# Altium PCB Dev_v2.PcbDoc
Units mm, origin at the board's own origin, x right, y up, seen from the top; angles counter-clockwise.
Board outline 55 x 35 mm, 2 copper layers (Top Layer, Bottom Layer); 51 components, 67 nets, 249 pads, 33 vias.
Unrouted connection lines stored in the file: 41.
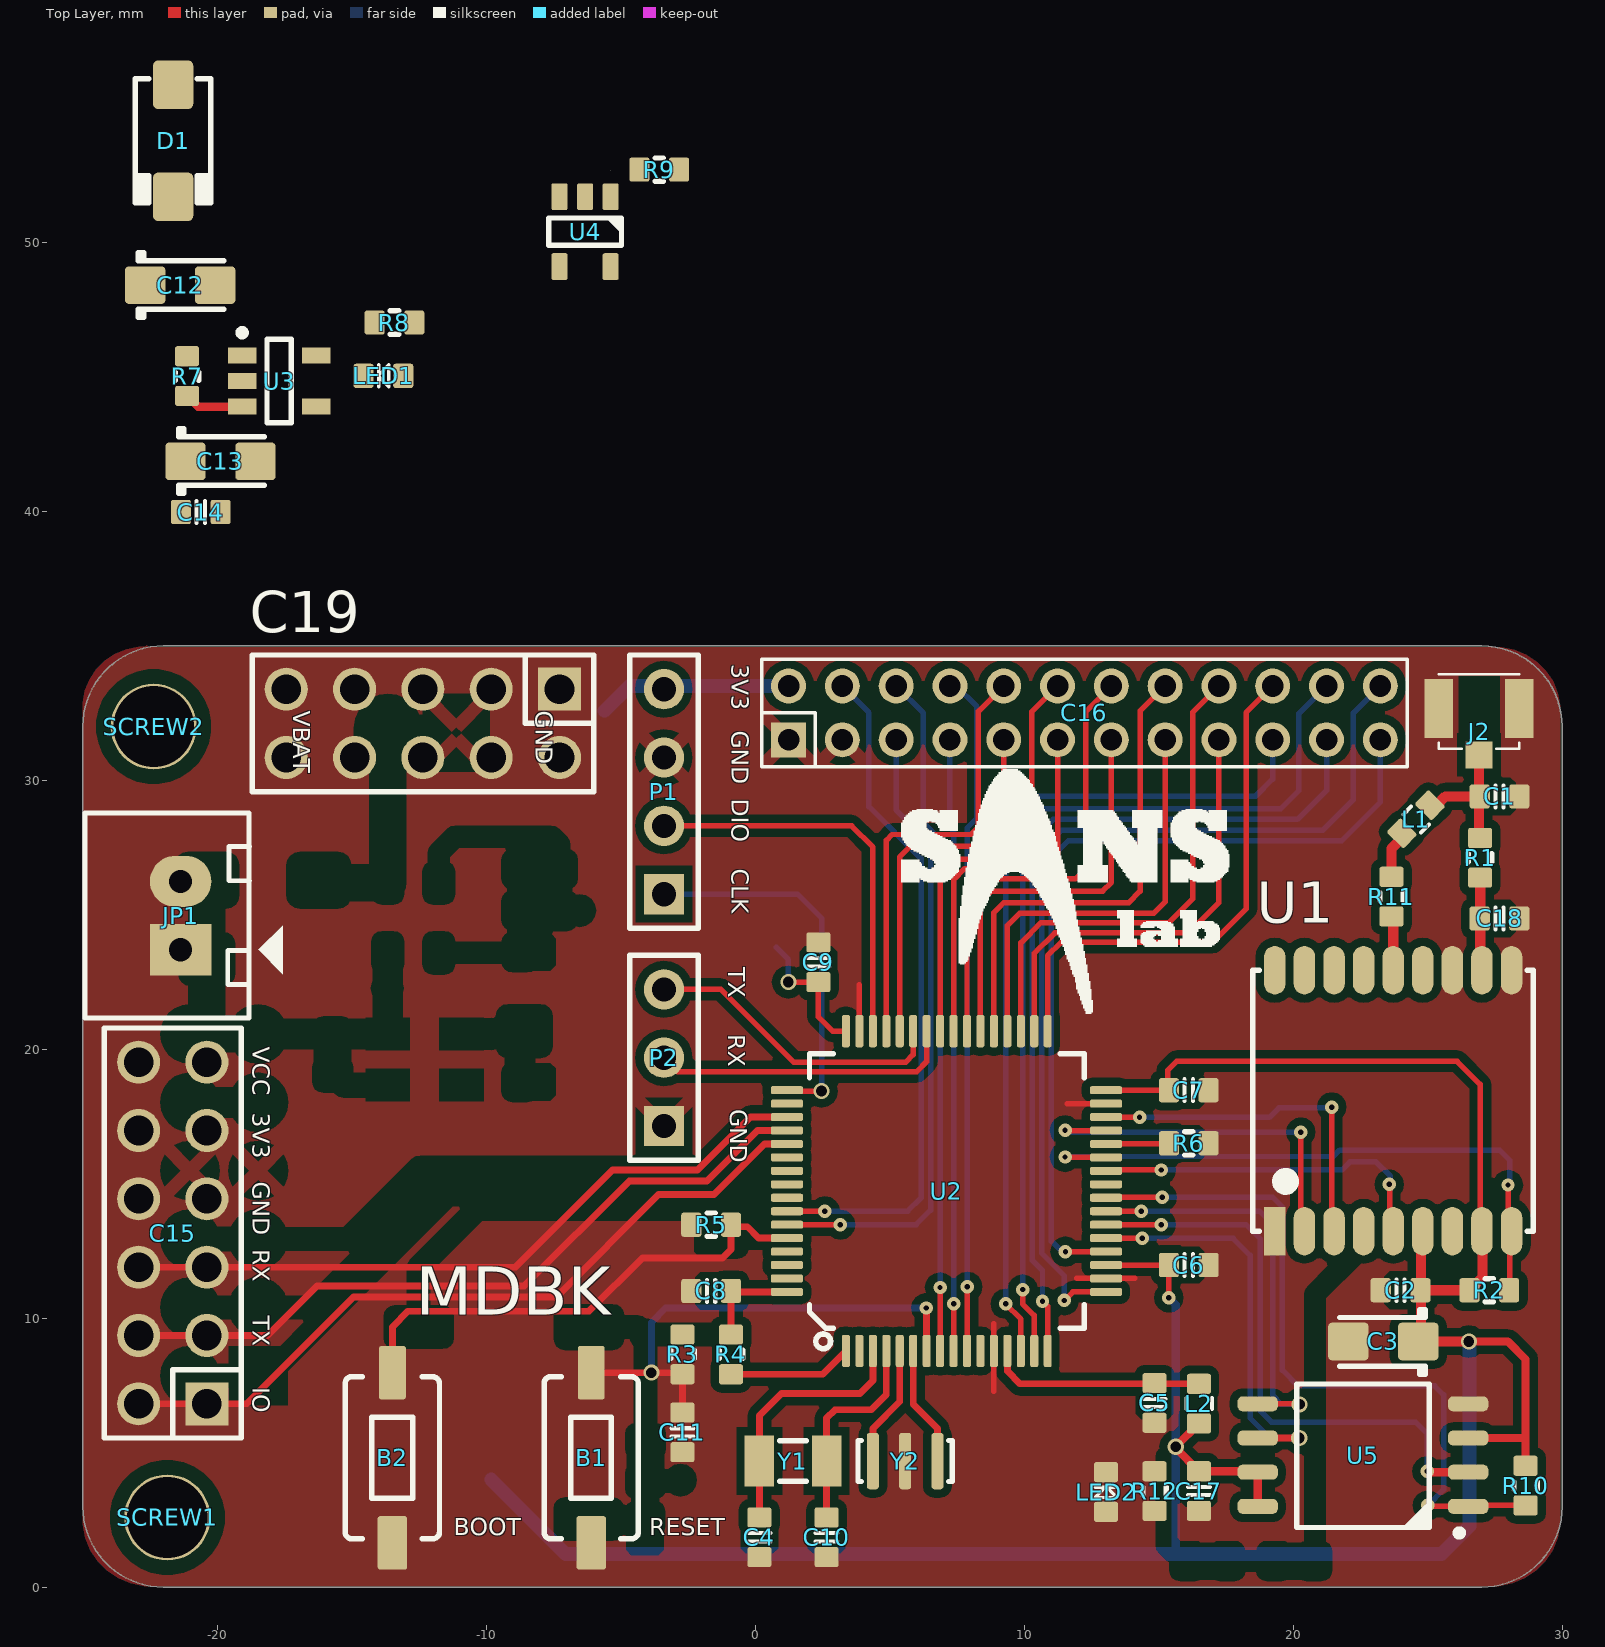
[diagram p0: Top Layer view]
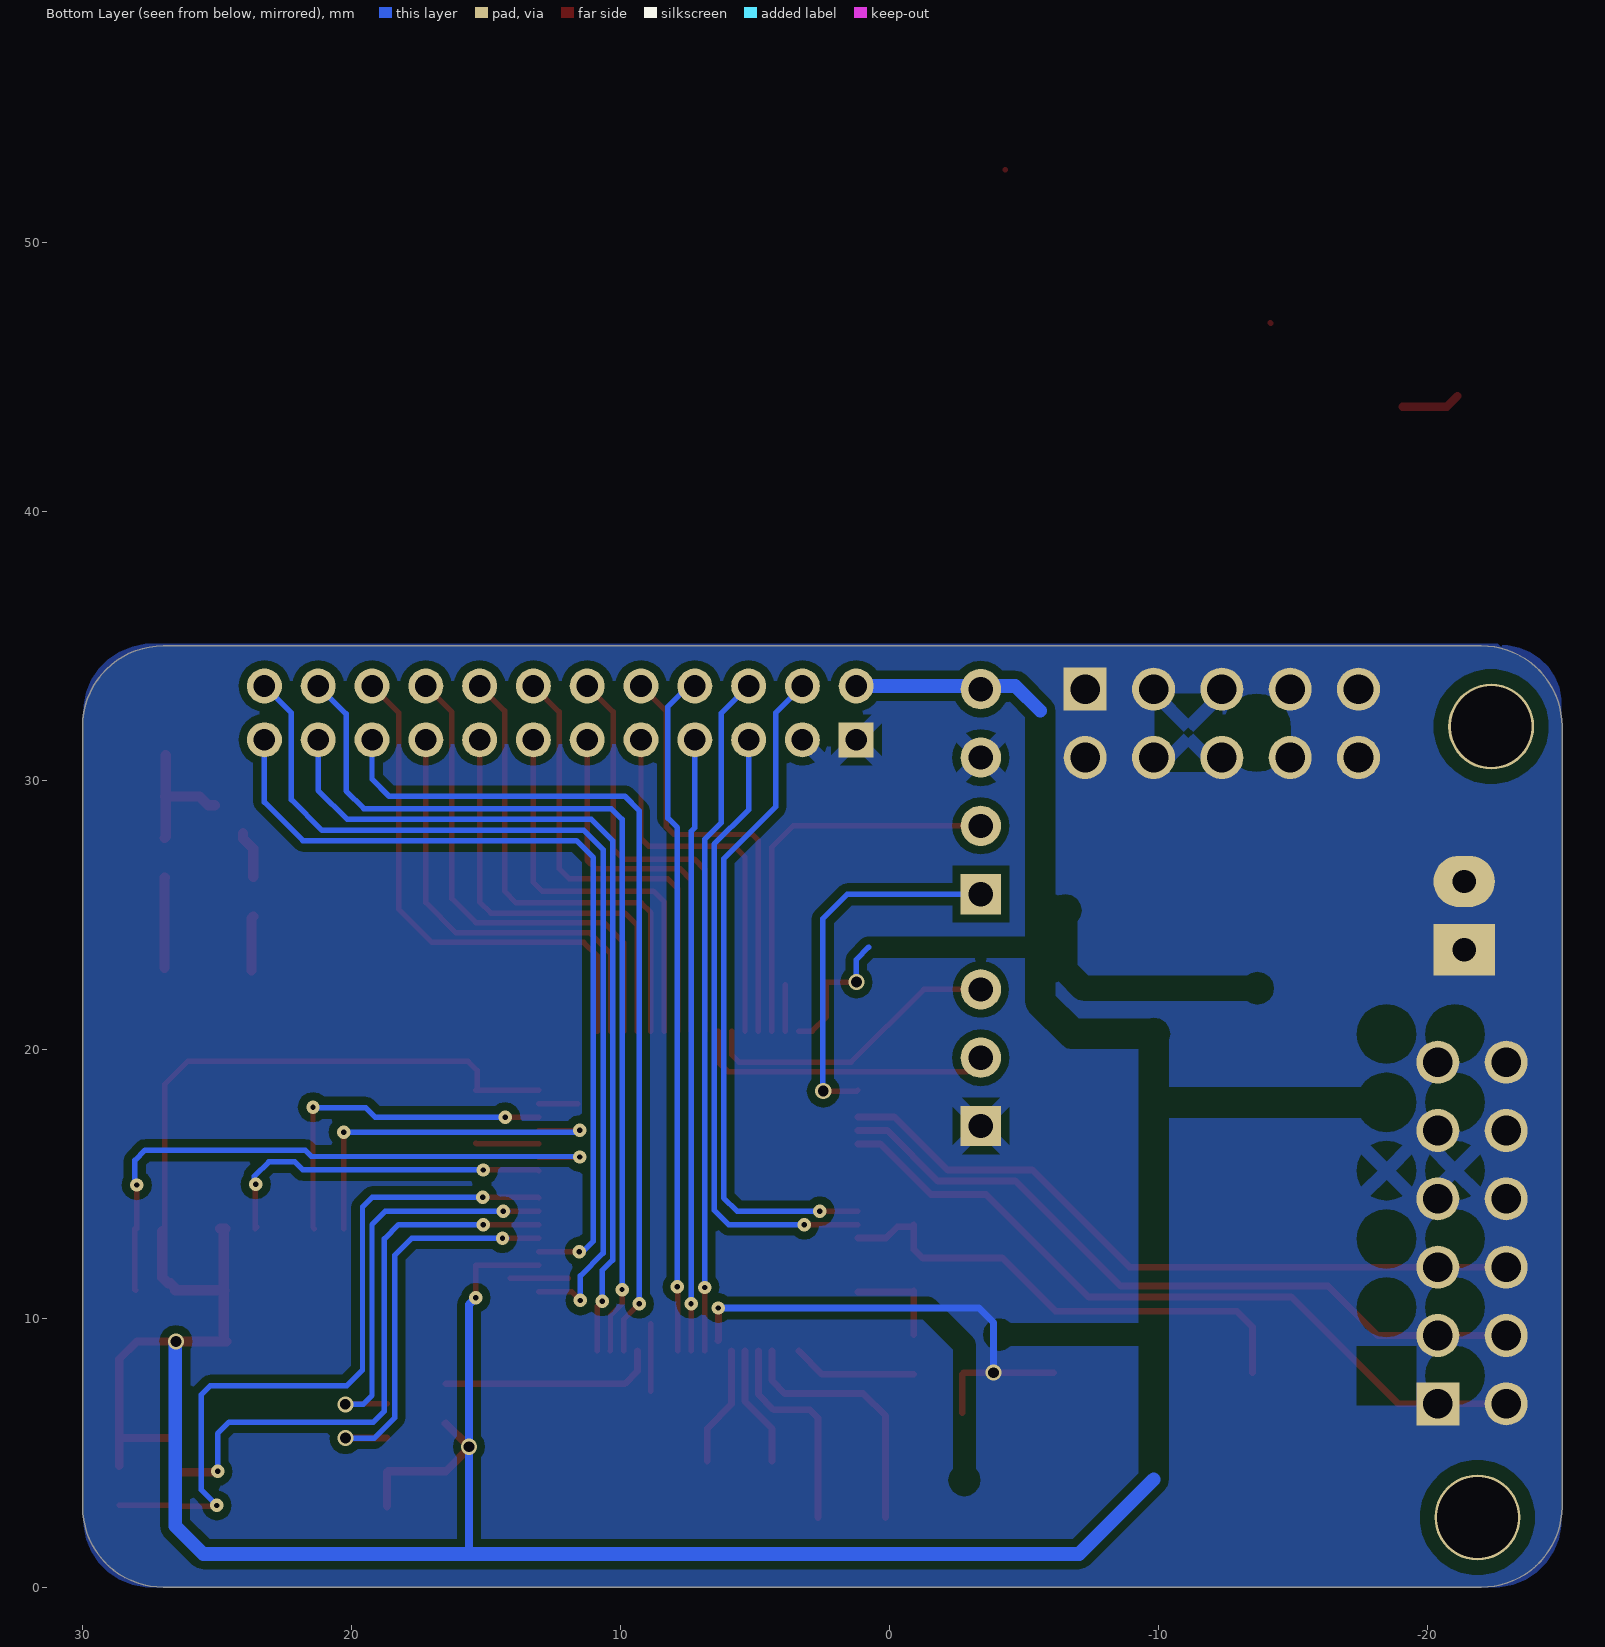
[diagram p1: Bottom Layer view, seen from below]

## Layer stack, top to bottom
Top Solder: solder mask 0.0102, Solder Resist, Dk 3.5
Top Layer: signal copper 0.0356
Dielectric 1: dielectric 0.32, FR-4, Dk 4.8
Bottom Layer: signal copper 0.0356
Bottom Solder: solder mask 0.0102, Solder Resist, Dk 3.5

## Board outline
-25,2.999 -25,31.998 cw(c-22,31.998) -22,34.998 27,34.998 cw(c27,31.998) 30,31.998 30,2.998 cw(c27,2.998) 27,-0.002 -21.999,-0.002 cw(c-21.999,2.999)

## Design rules (kind name [scope] priority, off if disabled: settings)
Clearance [All] p1: gap=0.15 ignorepadtopadclearanceinfootprint=FALSE except(0: Arc-Hole Track-Hole SMDPad-Hole THPad-Hole Via-Hole Fill-Hole Poly-Hole Region-Hole Text-Hole; 0.076: Track-Via; 0.3: Arc-Poly Track-Poly SMDPad-Poly THPad-Poly Via-Poly Fill-Poly Poly-Poly Poly-Region)
ComponentClearance [All] p1: gap=0.1 collisioncheckmode=3 verticalgap=0.1 showdistances=FALSE
HoleSize [All] p1: absolutevalues=TRUE maxlimit=5.08 minlimit=0.025 maxpercent=80.000 minpercent=20.000
MinimumSolderMaskSliver [All] p1: minsoldermaskwidth=0.127
PlaneClearance [All] p1: clearance=0.3
PlaneConnect [All] p1: pad.planeconnectstyle=Direct pad.reliefexpansion=0.2 pad.reliefentries=4 pad.reliefconductorwidth=0.3 pad.reliefairgap=0.2 via.planeconnectstyle=Relief via.reliefexpansion=0.2 via.reliefentries=4 via.reliefconductorwidth=0.3 via.reliefairgap=0.2
PolygonConnect [All] p1: thpad.connectstyle=Relief thpad.reliefconductorwidth=0.5 thpad.reliefentries=4 thpad.polygonreliefangle="45 Angle" thpad.airgapwidth=0.3 smdpad.connectstyle=Direct smdpad.reliefconductorwidth=0.3 smdpad.reliefentries=4 smdpad.polygonreliefangle="90 Angle" smdpad.airgapwidth=0.3 via.connectstyle=Direct via.reliefconductorwidth=0.3 via.reliefentries=4 via.polygonreliefangle="90 Angle" via.airgapwidth=0.3
RoutingVias [All] p1: holewidth=0.45 width=0.254 viastyle="Through Hole" minholewidth=0.152 minwidth=0.254 maxholewidth=0.6 maxwidth=1.1
SilkToSolderMaskClearance [IsPad] p1: minsilkscreentomaskgap=0.025 clearancetoexposedcopper=TRUE
SolderMaskExpansion [All] p1: expansion=0.102
Width [All] p1: maxlimit=1.5 minlimit=0.15 preferedwidth=0.2
24 further rules are at their usual default settings.

## Classes and differential pairs
component class PWR: C12 C13 C14 D1 JP1 LED1 R7 R8 R9 U3 U4
component class MCU: B1 B2 C4 C5 C6 C7 C8 C9 C10 C11 L2 P1 P2 R3 R4 R5 R6 U2 Y1 Y2
component class GPS: C1 C2 C3 C18 J2 L1 LED2 R1 R2 R11 U1
component class FLASH: C17 R10 U5
component class ACCESSORY: C15 C16 C19 SCREW1 SCREW2

## Components (designator, comment, footprint, x,y, rotation, side; value= is the part's Value field where it differs from the comment)
B1 "Reset" TACTILE-SWITCH-1101NE -6.096,4.801 r90 top
B2 "BootLoader" TACTILE-SWITCH-1101NE -13.487,4.801 r90 top
C1 "DNP" C_0603 27.67,29.399 r0 top
C2 "0.01uF" C_0603 23.991,11.041 r0 top
C3 "10uF" "CASE A" 24.651,9.136 r180 top
C4 "10p" C_0603 0.155,1.855 r90 top
C5 "104" C_0603 14.846,6.85 r90 top
C6 "104" C_0603 16.116,11.978 r180 top
C7 "104" C_0603 16.116,18.478 r180 top
C8 "104" C_0603 -1.638,11.015 r0 top
C9 "104" C_0603 2.35,23.233 r270 top
C10 "10p" C_0603 2.654,1.855 r90 top
C11 "104" C_0603 -2.705,5.757 r270 top
C12 "10uF" "CASE A" -22.679,48.404 r0 top
C13 "10uF" "CASE A" -21.18,41.856 r0 top
C14 "0.01uF" C_0603 -20.612,39.971 r180 top
C15 "JP6x2" JP6-D2T -21.653,13.168 r90 top
C16 "JP12x2-2.0" J12-D2T 12.24,32.504 r0 top
C17 "0.01uF" C_0603 16.497,3.573 r90 top
C18 "DNP" C_0603 27.67,24.861 r0 top
C19 "JP5x2" JP5-D2T -12.355,32.114 r180 top
D1 "1N5822" DO-214AC -21.641,53.772 r270 top
J2 "Anten" ANTEN_IPEX 26.908,30.943 r90 top
JP1 "JP2" CON2 -21.361,23.698 r90 top value="Connector 2"
L1 "27nH" INDUCTOR_0603 24.561,28.551 r45 top
L2 "100uH" INDUCTOR_0603 16.497,6.825 r90 top
LED1 "LED" LED_0603 -13.824,45.034 r180 top
LED2 "LED" LED_0603 13.041,3.54 r90 top
P1 "SWD" HDR1X4 -3.392,25.764 r90 top
P2 "Header 3" HDR1X3 -3.392,17.144 r90 top
R1 "0R" R_0603 26.947,27.116 r90 top
R2 "4.7k" R_0603 27.292,11.041 r0 top
R3 "10k" R_0603 -2.705,8.653 r270 top
R4 "22R" R_0603 -0.902,8.653 r270 top
R5 "10k" R_0603 -1.638,13.478 r0 top
R6 "10k" R_0603 16.116,16.502 r180 top
R7 "100k" R_0603 -21.12,45.026 r90 top
R8 "5k" R_0603 -13.411,47.015 r0 top
R9 "1k" R_0603 -3.569,52.701 r0 top
R10 "10k" R_0603 28.639,3.777 r90 top
R11 "10R" R_0603 23.652,25.675 r90 top
R12 "4.7k" R_0603 14.846,3.573 r90 top
SCREW1 "Screw Non-Plated" SCREW_NON-PLATED_2MM -21.857,2.592 r90 top
SCREW2 "Screw Non-Plated" SCREW_NON-PLATED_2MM -22.365,31.996 r90 top
U1 "L70-R" MODULE_MAX-7Q 19.318,13.186 r0 top
U2 "STM32F072RBT6TR" STM32L072RBT 7.123,14.728 r90 top
U3 "AP2112K" SOT25 -17.698,44.838 r0 top
U4 "MCP73831T" SOT23-5 -6.325,50.394 r270 top
U5 "16 Mbit SPI Serial Flash" SOIC127P790X216-8N 22.593,4.911 r180 top
Y1 "Crystal_2P" Crystal_2P 1.404,4.691 r180 top value=32K
Y2 "CSTCE 8MHz" Crystal_4P 5.575,4.691 r0 top

## Footprints (in the part's own frame and the unit in brackets; to place one, negate y for a bottom-side part, rotate by r counter-clockwise, add the part's x,y. Pads: shape width x height; smd on the part's side, far side on the other; paste and mask are expansions set on the pad)
ANTEN_IPEX [mm]
  rect 1x1 smd: 1(0,0)
  rect 2.2x1.05 smd: 2(1.727,-1.5) 2(1.727,1.5)
  Top Layer pour cut-out: 0.635,0.762 0.635,-0.762 2.921,-0.762 2.921,0.762
  silkscreen extent 0.23,-1.5 3,1.5, body extent 0.15,-1.5 3.25,1.5, height 1.25
C_0603 [mm]
  rrect25% 0.75x0.9 smd: 1(-0.737,0) 2(0.737,0)
  Top Layer pour cut-out: -0.6,0.5 -0.4,0.7 0.4,0.7 0.6,0.5 0.6,-0.5 0.4,-0.7 -0.4,-0.7 -0.6,-0.5
  silkscreen extent -0.15,-0.41 0.15,0.41, body extent -0.8,-0.41 0.8,0.41, height 0.81
"CASE A" [mm]
  rrect20% 1.5x1.4 smd: A(0,0) K(2.6,0)
  silkscreen extent -0.26,-1.19 2.92,1.21, body extent -0.3,-0.8 2.9,0.8, height 1.6
CON2 [mil] "CON2"
  rect 75x90 hole 34: 1(0,0)
  oval 75x90 hole 34: 2(100,0)
  silkscreen extent -100,-150 200,140, body extent -68,-70 168,107, height 236
Crystal_2P [mm]
  rect 1.1x1.9 smd: 1(-1.25,0) 2(1.25,0)
  silkscreen extent -0.5,-0.75 0.5,0.75, body extent -1.61,-0.76 1.61,0.76, height 0.92
Crystal_4P [mm]
  rrect50% 0.45x2.1 smd: 1(-1.2,0) 2(0,0) 3(1.2,0)
  silkscreen extent -1.75,-0.76 1.75,0.76, body extent -1.6,-0.65 1.6,0.65, height 0.7
DO-214AC [mm] "JEDEC DO214 variation AC. SMA"
  round 0.508 on Mech15: 0(0,0)
  rrect25% 1.8x1.5 smd: A(-2.083,0) K(2.083,0)
  silkscreen extent -2.3,-1.4 2.3,1.4, body extent -2.75,-1.37 2.75,1.43, height 2.6
HDR1X3 [mm] "Connector; Header; 3 Position"
  rect 1.5x1.5 hole 0.9: 1(0,0)
  round 1.5 hole 0.9: 2(2.54,0) 3(5.08,0)
  silkscreen extent -1.27,-1.27 6.35,1.27, body extent -1.27,-1.27 6.35,1.27, height 7
HDR1X4 [mm] "Connector; Header; 4 Position"
  rect 1.5x1.5 hole 0.9: 1(0,0)
  round 1.5 hole 0.9: 2(2.54,0) 3(5.08,0) 4(7.62,0)
  silkscreen extent -1.27,-1.27 8.89,1.27, body extent -1.27,-1.27 8.89,1.27, height 7
INDUCTOR_0603 [mm]
  rrect25% 0.75x0.9 smd: 1(-0.737,0) 2(0.737,0)
  Top Layer pour cut-out: -0.6,0.5 -0.4,0.7 0.4,0.7 0.6,0.5 0.6,-0.5 0.4,-0.7 -0.4,-0.7 -0.6,-0.5
  silkscreen extent -0.2,-0.48 0.2,0.46, body extent -0.8,-0.4 0.8,0.4, height 0.96
J12-D2T [mm] "24 pins, dual row, straight, gold plating"
  rect 1.3x1.3 hole 0.8: 1(-11,-1)
  round 1.3 hole 0.8: 2(-9,-1) 3(-7,-1) 4(-5,-1) 5(-3,-1) 6(-1,-1) 7(1,-1) 8(3,-1) 9(5,-1) 10(7,-1) 11(9,-1) 12(11,-1) 13(11,1) 14(9,1) 15(7,1) 16(5,1) 17(3,1) 18(1,1) 19(-1,1) 20(-3,1) 21(-5,1) 22(-7,1) 23(-9,1) 24(-11,1)
  silkscreen extent -12,-2 12,2, body extent -12,-2 12,2, height 6.01
JP5-D2T [mm] "10 pins, dual pin, straight, gold plating"
  rect 1.6x1.6 hole 1.1: 1(-5.08,-1.27)
  round 1.6 hole 1.1: 2(-2.54,-1.27) 3(0,-1.27) 4(2.54,-1.27) 5(5.08,-1.27) 6(5.08,1.27) 7(2.54,1.27) 8(0,1.27) 9(-2.54,1.27) 10(-5.08,1.27)
  silkscreen extent -6.35,-2.54 6.35,2.54, body extent -6.35,-2.54 6.35,2.54, height 8.55
JP6-D2T [mm] "12 pins, dual pin, straight, gold plating"
  rect 1.6x1.6 hole 1.1: 1(-6.35,-1.27)
  round 1.6 hole 1.1: 2(-3.81,-1.27) 3(-1.27,-1.27) 4(1.27,-1.27) 5(3.81,-1.27) 6(6.35,-1.27) 7(6.35,1.27) 8(3.81,1.27) 9(1.27,1.27) 10(-1.27,1.27) 11(-3.81,1.27) 12(-6.35,1.27)
  silkscreen extent -7.62,-2.54 7.62,2.54, body extent -7.62,-2.54 7.62,2.54, height 8.55
LED_0603 [mm]
  rrect25% 0.75x0.9 smd: A(-0.737,0) K(0.737,0)
  Top Layer pour cut-out: -0.6,0.5 -0.4,0.7 0.4,0.7 0.6,0.5 0.6,-0.5 0.4,-0.7 -0.4,-0.7 -0.6,-0.5
  silkscreen extent -0.2,-0.41 0.18,0.41, body extent -0.8,-0.4 0.8,0.4, height 0.75
MODULE_MAX-7Q [mm]
  rect 0.8x1.8 smd: 1(0,0.05)
  oval 0.8x1.8 smd: 2(1.1,0.05) 3(2.2,0.05) 4(3.3,0.05) 5(4.4,0.05) 6(5.5,0.05) 7(6.6,0.05) 8(7.7,0.05) 9(8.8,0.05) 10(8.8,9.75) 11(7.7,9.75) 12(6.6,9.75) 13(5.5,9.75) 14(4.4,9.75) 15(3.3,9.75) 16(2.2,9.75) 17(1.1,9.75) 18(0,9.75)
  silkscreen extent -0.82,0.05 9.6,9.75, body extent -0.65,0.03 9.45,9.75, height 2.51
R_0603 [mm]
  round 0.254 on Mech15: 0(0,0)
  rrect25% 0.75x0.9 smd: 1(-0.737,0) 2(0.737,0)
  Top Layer pour cut-out: -0.6,0.5 -0.4,0.7 0.4,0.7 0.6,0.5 0.6,-0.5 0.4,-0.7 -0.4,-0.7 -0.6,-0.5
  silkscreen extent -0.15,-0.43 0.15,0.43, body extent -0.8,-0.4 0.8,0.4, height 0.46
SCREW_NON-PLATED_2MM [mm]
  round 3.2 hole 3 unplated paste+1 mask+1: HOLE(0,0)
  Top Layer pour cut-out: -0.209,-2.127 -0.62,-2.045 -1.007,-1.885 -1.356,-1.652 -1.652,-1.356 -1.885,-1.007 -2.045,-0.62 -2.127,-0.209 -2.127,0.209 -2.045,0.62 -1.885,1.007 -1.652,1.356 -1.356,1.652 -1.007,1.885 -0.62,2.045 -0.209,2.127 0.209,2.127 0.62,2.045 1.007,1.885 1.356,1.652 1.652,1.356 1.885,1.007 2.045,0.62 2.127,0.209 2.127,-0.209 2.045,-0.62 1.885,-1.007 1.652,-1.356 1.356,-1.652 1.007,-1.885 0.62,-2.045 0.209,-2.127
  Bottom Layer pour cut-out: -0.209,-2.127 -0.62,-2.045 -1.007,-1.885 -1.356,-1.652 -1.652,-1.356 -1.885,-1.007 -2.045,-0.62 -2.127,-0.209 -2.127,0.209 -2.045,0.62 -1.885,1.007 -1.652,1.356 -1.356,1.652 -1.007,1.885 -0.62,2.045 -0.209,2.127 0.209,2.127 0.62,2.045 1.007,1.885 1.356,1.652 1.652,1.356 1.885,1.007 2.045,0.62 2.127,0.209 2.127,-0.209 2.045,-0.62 1.885,-1.007 1.652,-1.356 1.356,-1.652 1.007,-1.885 0.62,-2.045 0.209,-2.127
SOIC127P790X216-8N [mil]
  rrect70% 59x22 smd: 1(-154,75) 2(-154,25) 3(-154,-25) 4(-154,-75) 5(154,-75) 6(154,-25) 7(154,25) 8(154,75)
  silkscreen extent -146,-104 97,119, body extent -160,-107 159,107, height 65
SOT23-5 [mm]
  round 0.5 on Mech15: 0(0,0)
  rrect25% 1x0.6 smd: 1(-1.3,0.95) 2(-1.3,0) 3(-1.3,-0.95) 4(1.3,-0.95) 5(1.3,0.95)
  silkscreen extent -0.51,-1.35 0.51,1.35, body extent -1.4,-1.45 1.4,1.45, height 1.44
SOT25 [mm]
  rect 1.05x0.6 smd: 1(-1.375,0.95) 2(-1.375,0) 3(-1.375,-0.95) 4(1.375,-0.95) 5(1.375,0.95)
  silkscreen extent -1.5,-1.55 0.45,1.92, body extent -1.5,-1.55 1.5,1.55, height 1.3
STM32L072RBT [mm]
  rrect50% 1.2x0.3 smd: 1(-5.944,3.75) 2(-5.944,3.25) 3(-5.944,2.75) 4(-5.944,2.25) 5(-5.944,1.75) 6(-5.944,1.25) 7(-5.944,0.75) 8(-5.944,0.25) 9(-5.944,-0.25) 10(-5.944,-0.75) 11(-5.944,-1.25) 12(-5.944,-1.75) 13(-5.944,-2.25) 14(-5.944,-2.75) 15(-5.944,-3.25) 16(-5.944,-3.75) 33(5.944,-3.75) 34(5.944,-3.25) 35(5.944,-2.75) 36(5.944,-2.25) 37(5.944,-1.75) 38(5.944,-1.25) 39(5.944,-0.75) 40(5.944,-0.25) 41(5.944,0.25) 42(5.944,0.75) 43(5.944,1.25) 44(5.944,1.75) 45(5.944,2.25) 46(5.944,2.75) 47(5.944,3.25) 48(5.944,3.75)
  rrect50% 0.3x1.2 smd: 17(-3.75,-5.918) 18(-3.25,-5.918) 19(-2.75,-5.918) 20(-2.25,-5.918) 21(-1.75,-5.918) 22(-1.25,-5.918) 23(-0.75,-5.918) 24(-0.25,-5.918) 25(0.25,-5.918) 26(0.75,-5.918) 27(1.25,-5.918) 28(1.75,-5.918) 29(2.25,-5.918) 30(2.75,-5.918) 31(3.25,-5.918) 32(3.75,-5.918) 49(3.75,5.944) 50(3.25,5.944) 51(2.75,5.944) 52(2.25,5.944) 53(1.75,5.944) 54(1.25,5.944) 55(0.75,5.944) 56(0.25,5.944) 57(-0.25,5.944) 58(-0.75,5.944) 59(-1.25,5.944) 60(-1.75,5.944) 61(-2.25,5.944) 62(-2.75,5.944) 63(-3.25,5.944) 64(-3.75,5.944)
  silkscreen extent -5.86,-5.11 5.11,5.11, body extent -6.03,-6.03 6.03,6.03, height 1.61
TACTILE-SWITCH-1101NE [mm]
  rrect20% 2x1.1 smd: 1(-3.15,0)
  rrect20% 2x1 smd: 2(3.175,0)
  silkscreen extent -3,-1.75 3.02,1.75, body extent -4,-1.82 4,1.88, height 2.5

## Part data
B1 B2: library part Button_2P_SMD
C1 C2 C14 C17 C18: library part CAP_0603
C3: library part Capacitor-Tantalium, "CAP TANT 10UF 16V 10% 2917", Case="A CASE", Manufacturer=KEMET, Manufacturer1 Example=MDBK, Manufacturer Part Number=T491A106K010AT, Tolerance=20%, Voltage=10VDC, ComponentHeigh=https://www.mouser.vn, Component Type=Standard, ID=3, Mounted=Yes, Part Description="CAP TANT 10UF 10V 10% 1206", Part Number=T491A106K010AT, Pin Count=2, SMD=Yes, Socket=No, Status="Not Recommended"
C4 C5 C6 C7 C8 C9 C10 C11: library part "Cap SMD 0805", "Capacitor SMD", LatestRevisionDate=17-Jul-2002, LatestRevisionNote="Re-released for DXP Platform.", PackageReference=RAD-0.3, Published=8-Jun-2000, Publisher="Altium Limited"
C12 C13: "CAP TANT 10UF 16V 10% 2917", Case="A CASE", Manufacturer=KEMET, Manufacturer1 Example=MDBK, Manufacturer Part Number=T491A106K010AT, Tolerance=20%, Voltage=10VDC, ComponentHeigh=https://www.mouser.vn, Component Type=Standard, ID=3, Mounted=Yes, Part Description="CAP TANT 10UF 10V 10% 1206", Part Number=T491A106K010AT, Pin Count=2, SMD=Yes, Socket=No, Status="Not Recommended"
C15: "WR-PHD 2.54 mm Dual Socket Header", Manufacturer="W¨¹rth Elektronik eiSos GmbH", partNo=61301221821, ComponentLink1 Description=Manufacturer, ComponentLink1URL=http://www.we-online.com, ComponentLink2 Description=Datasheet, ComponentLink2URL=http://katalog.we-online.de/em/datasheet/6130xx21821.pdf, Created by="Karrer Zheng", Created Date="29 March 2013", NoPins=12
C16: "WR-PHD 2.00 mm Dual Pin Header", Manufacturer="W¨¹rth Elektronik eiSos GmbH", partNo=62002421121, ComponentLink1 Description=Manufacturer, ComponentLink1URL=http://www.we-online.com, ComponentLink2 Description=Datasheet, ComponentLink2URL=http://katalog.we-online.de/em/datasheet/6200xx21121.pdf, Created by="Karrer Zheng", Created Date="2 April 2013", NoPins=24, System=Connector
C19: "WR-PHD 2.54 mm Dual Socket Header", Manufacturer="W¨¹rth Elektronik eiSos GmbH", partNo=61301021821, ComponentLink1 Description=Manufacturer, ComponentLink1URL=http://www.we-online.com, ComponentLink2 Description=Datasheet, ComponentLink2URL=http://katalog.we-online.de/em/datasheet/6130xx21821.pdf, Created by="Karrer Zheng", Created Date="29 March 2013", NoPins=10
D1: library part DIODE_1N5822, "3A 40V SS34"
J2: library part ANTEN_IPEX, "CONN UMC RCPT STR 50 OHM SMD", Case/Package=SMD/SMT, Housing Color=White, Manufacturer=Taoglas, Manufacturer Part Number=RECE.20279.001E.01, Package Quantity=1, Supplier Part Number 1=931-1107-6-ND, Body Material=Brass, Body Plating=Gold, Connector Type="Coaxial,Male Pin", Contact Material=Brass, Contact Plating=Gold, Fastening Type=Snap, Gender=Male, Mount="Surface Mount", Orientation=Straight, Packaging="Tape and Reel", Pricing 1="1=0.75 (USD)", Stock 1=45630, Supplier 1=Digi-Key, Termination=Solder
JP1: library part Con2, "Connector 2"
L1: library part INDUCTOR_0603
L2: library part INDUCTOR_0805
LED1 LED2: library part LED_0603
P1: library part "Header 4", "Header, 4-Pin", LatestRevisionDate=17-Jul-2002, LatestRevisionNote="Re-released for DXP Platform.", Publisher="Altium Limited"
P2: "Header, 3-Pin", LatestRevisionDate=17-Jul-2002, LatestRevisionNote="Re-released for DXP Platform.", Publisher="Altium Limited"
R1 R2 R7 R8 R9 R10 R11 R12: library part RES_0603
R3 R4 R5 R6: library part RESISTOR_0805
SCREW1 SCREW2: library part SCREW_NON-PLATED
U1: "GPS Receiver 1575.42MHz 2.5V/3.3V 18-Pin", Manufacturer="Quectel Wireless Solutions", Manufacturer Part Number=L70R, Max Frequency=1.57542GHz, Max Operating Temperature=85°C, Min Operating Temperature=-40°C, Supplier Part Number 1=L70R-M37, ComponentLink1Description=https://datasheet.ciiva.com/48437/quectel-l70-r-gps-specification-v1-0-48437770.pdf?src-supplier=Avnet, ComponentLink1URL=https://datasheet.ciiva.com/48437/quectel-l70-r-gps-specification-v1-0-48437770.pdf?src-supplier=Avnet, Packaging="Tape and Reel", Radiation Hardening=No, RoHS=Yes, Stock 1=0, Supplier 1=Avnet
U2: "IC MCU 32BIT 128KB FLASH 64LQFP", Case/Package=LQFP, Frequency=48MHz, Manufacturer=STMicroelectronics, Manufacturer Part Number=STM32F072RBT6, Max Operating Temperature=85°C, Max Power Dissipation=455mW, Max Supply Voltage=3.6V, Min Operating Temperature=-40°C, Min Supply Voltage=2V, Package Quantity=960, Supplier Part Number 1=497-14644-ND, ComponentLink1Description=http://www.st.com/web/en/resource/technical/document/datasheet/DM00090510.pdf?src-supplier=Avnet, ComponentLink1URL=http://www.st.com/web/en/resource/technical/document/datasheet/DM00090510.pdf?src-supplier=Avnet, Core Architecture=ARM, Data Bus Width=32b, Interface=I2C,SPI,USB,CAN,HDMI,IrDA,UART,USART,LIN,I2S, Lead Free="Lead Free", Max Frequency=48MHz, Memory Size=128KB, Memory Type=FLASH, Mount="Surface Mount", Number of ADC Channels=19, Number of I/Os=51, Number of Pins=64, Number of Programmable I/O=51, Number of Timers/Counters=9, Oscillator Type=Internal, Packaging=Tray, Peripherals=POR,PWM,WDT,DMA, Pricing 1="1=3.93, 10=3.532, 160=2.89381, 640=2.46344, 1120=2.0776 (USD)", RAM Size=16KB, REACH SVHC="No SVHC", Stock 1=9149, Supplier 1=Digi-Key, Watchdog Timer=Yes, Weight=0.012088oz
U3: "IC REG LINEAR 3.3V 600MA SOT25", Case/Package=SOT-23-5, Dropout Voltage=250mV, Manufacturer=Diodes, Manufacturer Part Number=AP2112K-3.3TRG1, Max Input Voltage=6V, Max Operating Temperature=85°C, Max Output Current=600mA, Min Input Voltage=2.5V, Min Operating Temperature=-40°C, Output Voltage=3.3V, Package Quantity=1, Quiescent Current=55uA, Supplier Part Number 1=621-AP2112K-3.3TRG1, Accuracy=1.5%, ComponentLink1Description=http://www.diodes.com/datasheets/AP2112.pdf?src-supplier=Avnet, ComponentLink1URL=http://www.diodes.com/datasheets/AP2112.pdf?src-supplier=Avnet, ComponentLink2Description=https://www.diodes.com/assets/Datasheets/AP2112.pdf?src-supplier=Digi-Key, ComponentLink2URL=https://www.diodes.com/assets/Datasheets/AP2112.pdf?src-supplier=Digi-Key, Height=1.3mm, Lead Free="Lead Free", Length=3.1mm, Mount="Surface Mount", Number of Outputs=1, Number of Pins=5, Number of Regulators=1, Output Current=600mA, Output Type=Fixed, Packaging="Tape and Reel", Polarity=Positive, Pricing 1="1=0.47, 10=0.327, 50=0.327, 100=0.15, 1000=0.116, 10000=0.09 (USD)", Stock 1=34833, Supplier 1=Mouser, Width=1.7mm
U4: "IC CONTROLLR LI-ION 4.2V SOT23-5", Case/Package=SOT-23, Drain to Source Resistance=350mR, Manufacturer=Microchip, Manufacturer Part Number=MCP73831T-2ACI/OT, Max Charge Current=500mA, Max Input Voltage=6V, Max Operating Temperature=85°C, Max Output Voltage=4.5V, Max Power Dissipation=1.54W, Min Operating Temperature=-40°C, Min Output Voltage=4.168V, Min Supply Voltage=3.75V, Output Voltage=4.2V, Supplier Part Number 1=MCP73831T-2ACI/OTDKR-ND, Voltage Rating=4.534V, ComponentLink1Description=http://www.microchip.com/mymicrochip/filehandler.aspx?ddocname=en023833&src-supplier=Digi-Key, ComponentLink1URL=http://www.microchip.com/mymicrochip/filehandler.aspx?ddocname=en023833&src-supplier=Digi-Key, ComponentLink2Description=http://www.farnell.com/datasheets/630369.pdf?src-supplier=Element14, ComponentLink2URL=http://www.farnell.com/datasheets/630369.pdf?src-supplier=Element14, ComponentLink3Description=http://www.farnell.com/datasheets/2124927.pdf?src-supplier=Element14, ComponentLink3URL=http://www.farnell.com/datasheets/2124927.pdf?src-supplier=Element14, ComponentLink4Description=http://ww1.microchip.com/downloads/en/DeviceDoc/21984e.pdf?src-supplier=Avnet, ComponentLink4URL=http://ww1.microchip.com/downloads/en/DeviceDoc/21984e.pdf?src-supplier=Avnet, ComponentLink5Description=http://www.farnell.com/datasheets/2124927.pdf?src-supplier=Newark, ComponentLink5URL=http://www.farnell.com/datasheets/2124927.pdf?src-supplier=Newark, ComponentLink6Description=http://www.microchip.com/mymicrochip/filehandler.aspx?ddocname=en025112&src-supplier=Future+Electronics, ComponentLink6URL=http://www.microchip.com/mymicrochip/filehandler.aspx?ddocname=en025112&src-supplier=Future+Electronics, ComponentLink7Description=http://www.produktinfo.conrad.com/datenblaetter/650000-674999/651521-da-01-en-CONTR__MCP73831T_2ACI_OT_SOT_23_5_MCP.pdf?src-supplier=Conrad, ComponentLink7URL=http://www.produktinfo.conrad.com/datenblaetter/650000-674999/651521-da-01-en-CONTR__MCP73831T_2ACI_OT_SOT_23_5_MCP.pdf?src-supplier=Conrad, Contact Plating=Tin,Matte, Height=0.051inch, Lead Free="Lead Free", Length=0.122inch, Max Supply Voltage=6V, Mount="Surface Mount", Number of Cells=1, Number of Channels=1, Number of Outputs=1, Number of Pins=5, Output Current=500mA, Packaging="Tape and Reel", Pricing 1="1=0.58, 25=0.484, 100=0.4326 (USD)", Radiation Hardening=No, REACH SVHC="No SVHC", Stock 1=50323, Supplier 1=Digi-Key, Termination=SMD/SMT, Weight=0.00709oz, Width=0.071inch
U5: library part SST25VF016B, MPN=SST25VF016B-50-4I-S2AF, PACKAGE=SOIC-8, OC_FARNELL=1368695, OC_NEWARK=82R4471, SUPPLIER="SILICON STORAGE TECHNOLOGY"
Y2: library part Crystal_CSTCE, "(T) Crystal MHz with Capacitance Built-in"

## Via types
v1: diameter 0.5, hole 0.2, Top Layer to Bottom Layer, tented both sides, 26 vias
v2: diameter 0.6, hole 0.4, Top Layer to Bottom Layer, tented both sides, 6 vias
v3: diameter 0.6, hole 0.4, Top Layer to Bottom Layer, 1 vias

## Nets (pads, with @x,y where several pads share a name; then routed paths per layer and width w, separated by ;. In a path a pad name is that pad's centre, name@x,y a point inside that pad or via, vN(x,y) a via of type N, cw(c..) or ccw(c..) an arc to the next point about the centre after c; other vN are vias at no path point)
1PPS: LED2.K U1.4
3V3: B2.1 C2.2 C3.A C6.2 C7.2 C8.2 C9.2 C13.A C14.2 C15.5 C15.8 C16.24 C17.2 C19.1 C19.10 L2.1 P1.4 R2.1 R3.1 R4.1 R10.2 R12.2 U1.6 U1.8 U2.19 U2.32 U2.48 U2.64 U3.5 U5.3 U5.7 U5.8 | length 119.8
  Top Layer w0.203: v2@1.13,22.496 v2(1.232,22.496) C9.2 2.35,21.201 2.879,20.672 U2.48 ; U2.19 C6.2 v1(15.38,10.761) ; U2.32 C7.2 15.329,18.529 15.329,19.215 15.664,19.55 26.099,19.55 26.952,18.696 U1.8@26.952,13.327
  Top Layer w0.254: R4.1 C8.2@-0.902,10.978 ; C8.2 C8.2@-0.902,10.978 ; U2.64 C8.2@-0.902,10.978
  Top Layer w0.305: L2.1 v2(15.634,5.224) 15.634,5.173 C17.2 18.648,4.31 U5.7 U5.8 ; U5.3 28.639,5.546 ; v2(26.53,9.136) 27.978,9.136 28.639,8.475 28.639,5.546 ; R10.2 28.639,5.546
  Top Layer w0.381: U1.6@24.685,13.327 U1.6@24.883,13.327 ; C2.2 C2.2@24.752,11.041 ; U1.6@24.752,13.327 C2.2@24.752,11.041 ; v2(26.53,9.136) C3.A 24.752,9.237 C2.2@24.752,11.041 ; U1.8@27.041,13.236 27.041,11.527 26.815,11.3 26.74,11.3 26.555,11.116 R2.1 C2.2@24.752,11.041
  Bottom Layer w0.203: 0.775,23.792 1.232,23.334 v2(1.232,22.496)
  Bottom Layer w0.305: v1(15.38,10.761) 15.634,10.507 v2(15.634,5.224) 15.634,1.236
  Bottom Layer w0.508: -9.817,4.005 -7.048,1.236 15.634,1.236 25.514,1.236 26.556,2.278 v2@26.556,9.136 ; -5.601,32.58 -4.677,33.504 -3.392,33.504 C16.24
BAT_Backup: R4.2 U2.1 | length 4.6
  Top Layer w0.254: R4.2 2.506,7.917 U2.1
GND: B1.1 C1.2 C2.1 C3.K C4.1 C5.1 C6.1 C7.1 C8.1 C9.1 C10.1 C11.2 C12.K C13.K C14.1 C15.4 C15.9 C16.1 C16.2 C17.1 C18.2 C19.2 C19.9 J2.2 JP1.1 P1.3 P2.1 R5.1 R6.1 R8.2 U1.1 U1.10 U1.12 U2.12 U2.18 U2.31 U2.47 U2.63 U3.2 U4.2 U5.4 Y2.2 | length 7.9
  Top Layer w0.203: U2.47 3.873,22.395 ; 8.873,7.277 U2.12 8.873,9.801 ; 11.592,17.978 U2.31 ; 11.946,11.478 U2.18 14.105,11.478
MCU_BOOT0: B2.2 R5.2 U2.60 | length 18.7
  Top Layer w0.254: B2.2 -13.487,9.677 -12.903,10.262 -6.172,10.262 -4.191,12.243 -1.219,12.243 -0.902,12.56 R5.2 -0.824,13.401 -0.294,13.401 0.128,12.978 U2.60
MCU_BOOT1: R6.2 U2.28 | length 2.3
  Top Layer w0.203: U2.28 15.356,16.478 R6.2
MCU_RESET: B1.2 C11.1 R3.2 U2.7 | length 18.4
  Top Layer w0.254: B1.2 v3(-3.861,7.976) -2.764,7.976 R3.2 C11.1 ; v1(6.363,10.38) 6.363,9.172 U2.7@6.373,9.161
  Bottom Layer w0.254: v3(-3.861,7.976) -3.861,9.847 -3.327,10.38 v1(6.363,10.38)
MCU_VDDA: C5.2 L2.2 U2.13 | length 8.1
  Top Layer w0.254: U2.13 9.373,8.031 9.842,7.561 L2.2
NetC1_1: C1.1 J2.1 L1.2 R1.2 | length 5.1
  Top Layer w0.381: L1.2 25.332,29.072 25.659,29.399 C1.1@26.908,29.399 ; J2.1 C1.1@26.908,29.399 ; C1.1 C1.1@26.908,29.399 ; R1.2 26.908,27.891 C1.1@26.908,29.399
NetC15_1: C15.1 C15.12 U2.53 | length 28.1
  Top Layer w0.254: C15.12 C15.1 -18.912,6.818 -14.935,10.795 -7.391,10.795 -3.59,14.597 -1.537,14.597 0.344,16.478 U2.53
NetC15_2: C15.2 C15.11 U2.52 | length 27.3
  Top Layer w0.254: C15.11 C15.2 -18.137,9.358 -16.296,11.199 -8.588,11.199 -4.682,15.105 -1.791,15.105 0.082,16.978 U2.52
NetC15_3: C15.3 C15.10 U2.51 | length 26.4
  Top Layer w0.254: C15.10 C15.3 -8.917,11.898 -5.306,15.509 -2.149,15.509 -0.18,17.478 U2.51
NetC16_3: C16.3 U2.59 | length 23.6
  Top Layer w0.203: U2.59 1.181,13.476 3.162,13.476 v1(3.164,13.478)
  Bottom Layer w0.203: v1(3.164,13.478) 5.98,13.478 6.518,14.015 6.518,27.625 5.24,28.903 C16.3
NetC16_4: C16.4 U2.9 | length 22.8
  Top Layer w0.203: U2.9 7.373,10.527 v1(7.379,10.533)
  Bottom Layer w0.203: C16.4 7.24,28.237 7.379,28.097 v1(7.379,10.533)
NetC16_5: C16.5 U2.44 | length 14.3
  Top Layer w0.203: U2.44 5.373,27.146 5.779,27.551 8.954,27.551 9.24,27.837 C16.5
NetC16_6: C16.6 U2.40 | length 14.3
  Top Layer w0.203: U2.40 7.373,26.301 7.785,26.713 10.935,26.713 11.24,27.017 C16.6
NetC16_7: C16.7 U2.38 | length 15.3
  Top Layer w0.203: U2.38 8.373,25.472 8.776,25.874 12.916,25.874 13.24,26.198 C16.7
NetC16_8: C16.8 U2.36 | length 16.2
  Top Layer w0.203: U2.36 9.373,24.592 9.843,25.062 14.821,25.062 15.24,25.48 C16.8
NetC16_9: C16.9 U2.34 | length 16.6
  Top Layer w0.203: U2.34 10.373,23.56 11.138,24.325 16.116,24.325 17.24,25.448 C16.9
NetC16_10: C16.10 U2.14 | length 32.2
  Top Layer w0.203: v1(9.309,10.533) 9.873,9.969 U2.14
  Bottom Layer w0.203: v1(9.309,10.533) 9.309,28.872 9.843,29.405 18.606,29.405 19.24,30.039 C16.10
NetC16_11: C16.11 U2.16 | length 32.8
  Top Layer w0.203: v1(10.681,10.634) 10.873,10.442 U2.16
  Bottom Layer w0.203: v1(10.681,10.634) 10.681,11.777 10.297,12.161 10.297,27.752 11.087,28.541 20.155,28.541 21.24,29.626 C16.11
NetC16_12: C16.12 U2.20 | length 31.8
  Top Layer w0.203: v1(11.534,12.478) U2.20
  Bottom Layer w0.203: v1(11.534,12.478) 11.403,12.478 11.011,12.87 11.011,27.119 11.646,27.754 21.806,27.754 23.24,29.188 C16.12
NetC16_13: C16.13 U2.17 | length 35.8
  Top Layer w0.203: v1(11.494,10.66) 11.812,10.978 U2.17
  Bottom Layer w0.203: v1(11.494,10.66) 11.494,11.574 10.651,12.417 10.651,27.419 11.367,28.135 21.095,28.135 22.238,29.278 22.238,32.502 C16.13
NetC16_14: C16.14 U2.15 | length 35
  Top Layer w0.203: v1(9.944,11.066) 9.944,10.533 10.373,10.104 U2.15 U2.15@10.375,8.786
  Bottom Layer w0.203: v1(9.944,11.066) 9.944,28.541 10.351,28.948 19.545,28.948 20.206,29.608 20.206,32.47 C16.14
NetC16_15: C16.15 U2.33 | length 19.6
  Top Layer w0.203: U2.33 10.873,23.476 11.369,23.972 17.008,23.972 18.25,25.214 18.25,32.514 C16.15
NetC16_16: C16.16 U2.35 | length 18.7
  Top Layer w0.203: U2.35 9.873,23.958 10.624,24.708 15.382,24.708 16.269,25.595 16.269,32.533 C16.16
NetC16_17: C16.17 U2.37 | length 18.2
  Top Layer w0.203: U2.37 8.873,25.083 9.233,25.443 13.881,25.443 14.313,25.874 14.313,32.577 C16.17
NetC16_18: C16.18 U2.39 | length 17.2
  Top Layer w0.203: U2.39 7.873,25.962 8.242,26.332 11.9,26.332 12.281,26.713 12.281,32.545 C16.18
NetC16_19: C16.19 U2.41 | length 16.2
  Top Layer w0.203: U2.41 6.873,26.69 7.252,27.068 9.893,27.068 10.274,27.449 10.274,32.539 C16.19
NetC16_20: C16.20 U2.45 | length 16.4
  Top Layer w0.203: U2.45 4.873,27.763 5.093,27.983 8.014,27.983 8.293,28.262 8.293,32.558 C16.20
NetC16_21: C16.21 U2.10 | length 25.4
  Top Layer w0.203: U2.10 7.88,8.791 7.88,11.161 v1(7.887,11.168)
  Bottom Layer w0.203: C16.21 7.471,33.504 8.242,32.732 8.242,28.592 7.887,28.237 v1(7.887,11.168)
NetC16_22: C16.22 U2.8 | length 25.4
  Top Layer w0.203: U2.8 6.877,8.788 6.877,11.136 v1@6.873,11.14
  Top Layer w0.254: v1(6.871,11.142) v1@6.873,11.14
  Bottom Layer w0.203: C16.22 6.249,32.495 6.249,28.427 6.871,27.805 v1(6.871,11.142)
NetC16_23: C16.23 U2.58 | length 25.4
  Top Layer w0.203: U2.58 v1(2.588,13.978)
  Bottom Layer w0.203: v1(2.588,13.978) 2.589,13.979 3.372,13.979 3.373,13.978 5.668,13.978 6.165,14.475 6.165,27.08 4.229,29.016 4.229,32.514 C16.23
NetC19_3: C19.3 U2.54
NetC19_4: C19.4 U2.55
NetC19_5: C19.5 U2.56
NetC19_6: C19.6 U2.57
NetC19_7: C19.7 U2.61
NetC19_8: C19.8 U2.62
NetL1_1: L1.1 R11.2 | length 1.8
  Top Layer w0.381: R11.2 23.652,27.452 24.04,27.84 L1.1
NetLED1_K: LED1.K R9.1 | length 0
NetLED2_A: LED2.A R12.1
NetR2_2: R2.2 U1.9 U2.27 | length 23.2
  Top Layer w0.203: v1(11.519,15.994) 11.535,15.978 U2.27 ; U1.9@27.987,13.327 v1(27.987,14.952) ; R2.2 28.054,11.066 U1.9@28.054,13.327
  Bottom Layer w0.203: v1(11.519,15.994) 11.538,16.013 21.495,16.013 21.73,16.248 27.673,16.248 28.054,15.867 v1@28.054,14.952
NetR7_1: R7.1 U3.3 | length 2.2
  Top Layer w0.305: R7.1 -20.719,43.888 U3.3
NetR8_1: R8.1 U4.5 | length 0
  Top Layer w0.203: R8.1@-14.178,46.985 R8.1
NetR9_2: R9.2 U4.1
NetR10_1: R10.1 U2.24 U5.1 | length 27.3
  Top Layer w0.203: U2.24 13.059,14.495 v1(15.126,14.495) ; v1(25.006,3.04) 25.04,3.006 U5.1 26.538,3.04 R10.1
  Bottom Layer w0.203: v1@14.973,14.495 v1(15.126,14.495) 19.241,14.495 19.594,14.142 19.594,8.071 20.18,7.485 25.26,7.485 25.591,7.155 25.591,3.624 v1(25.006,3.04)
NetU1_2: U1.2 U2.29 | length 14
  Top Layer w0.203: v1(11.519,16.984) 11.526,16.978 U2.29 ; U1.2@20.285,13.327 v1(20.285,16.915)
  Bottom Layer w0.203: v1(11.519,16.984) 11.588,16.915 v1@20.352,16.915
NetU1_3: U1.3 U2.30 | length 13.2
  Top Layer w0.203: U2.30 14.277,17.478 v1(14.288,17.467) ; U1.3@21.385,13.327 21.433,13.376 v1(21.433,17.848)
  Bottom Layer w0.203: v1(14.288,17.467) 19.114,17.467 19.469,17.823 21.476,17.823 v1@21.501,17.848
NetU1_5: U1.5 | length 13.2
  Top Layer w0.203: 13.041,15.478 13.075,15.511 v1@15.081,15.511 ; U1.5@23.516,13.395 23.585,13.327 23.585,14.935 v1@23.542,14.978
  Bottom Layer w0.203: v1@14.948,15.511 v1(15.1,15.511) 21.806,15.511 22.111,15.816 23.076,15.816 23.609,15.283 v1@23.609,14.952
  other v1: 23.567,14.978
NetU2_21: U2.21 U5.6 | length 15.3
  Top Layer w0.203: U2.21 14.23,12.978 v1@14.237,12.971
  Top Layer w0.254: U5.6 v2(20.223,5.546)
  Bottom Layer w0.203: v1@14.237,12.971 v1(14.389,12.971) 17.767,12.971 18.402,12.336 18.402,6.291 19.147,5.546 v2(20.223,5.546)
NetU2_22: U2.22 U5.2 | length 21.7
  Top Layer w0.203: U2.22 13.043,13.476 14.945,13.476 v1@14.948,13.479
  Top Layer w0.305: v1(24.981,4.31) 25.014,4.276 U5.2
  Bottom Layer w0.203: v1(15.1,13.479) 18.25,13.479 18.783,12.946 18.783,6.545 19.19,6.139 24.549,6.139 24.981,5.707 v1(24.981,4.31)
NetU2_23: U2.23 U5.5 | length 15.6
  Top Layer w0.203: U2.23 v1(14.354,13.978) ; U5.5 20.214,6.816 v2(20.231,6.799)
  Bottom Layer w0.203: v1@14.202,13.978 v1(14.354,13.978) 14.357,13.981 18.739,13.981 19.241,13.479 19.241,7.129 19.571,6.799 v2(20.231,6.799)
NetU2_25: U2.25
NetU2_26: U2.26
OSC32_IN: C4.2 U2.3 Y1.2 | length 9.7
  Top Layer w0.254: C4.2 Y1.2 0.155,6.382 0.978,7.205 3.899,7.205 4.373,7.68 U2.3
OSC32_OUT: C10.2 U2.4 Y1.1 | length 7.9
  Top Layer w0.254: C10.2 Y1.1 2.654,6.291 2.959,6.596 4.305,6.596 4.873,7.164 U2.4
OSC_IN: U2.5 Y2.1 | length 4.5
  Top Layer w0.254: Y2.1 4.376,5.904 5.373,6.902 U2.5
OSC_OUT: U2.6 Y2.3 | length 4.5
  Top Layer w0.254: U2.6 5.873,6.806 6.776,5.904 Y2.3
RF_IN: C18.1 R1.1 U1.11 | length 3.4
  Top Layer w0.381: R1.1 26.952,26.374 26.952,24.861 U1.11@26.952,23.027
SWDCLK: P1.1 U2.49 | length 14
  Top Layer w0.203: U2.49 1.214,18.443 v2(2.462,18.443)
  Bottom Layer w0.203: P1.1 1.567,25.764 2.477,24.854 2.477,18.458 v2(2.462,18.443)
SWDIO: P1.2 U2.46 | length 14.9
  Top Layer w0.203: P1.2 3.584,28.304 4.373,27.515 U2.46
UART1_RX: P2.2 U2.42 | length 11.3
  Top Layer w0.203: P2.2 -2.876,19.169 6.007,19.169 6.373,19.535 U2.42 U2.42@6.375,20.67
UART1_TX: P2.3 U2.43 | length 11.4
  Top Layer w0.203: P2.3 -2.672,22.224 -1.274,22.224 1.426,19.524 5.601,19.524 5.873,19.797 U2.43
VBAT: D1.A JP1.2 U4.3
VCC: C12.A C15.6 C15.7 D1.K LED1.A R7.2 U3.1 U4.4
VCC_RF: R11.1 U1.14 | length 2
  Top Layer w0.381: R11.1 23.718,24.872 U1.14
pads on no net: D1.0 R1.0 R2.0 R3.0 R4.0 R5.0 R6.0 R7.0 R8.0 R9.0 R10.0 R11.0 R12.0 SCREW1.HOLE SCREW2.HOLE U1.7 U1.13 U1.15 U1.16 U1.17 U1.18 U2.2 U2.11 U2.50 U3.4 U4.0

## Polygon pours and split planes (outlines as drawn)
GND on Bottom Layer "Bottom Layer-GND" (solid, remove dead copper, pour order 2): -22.746,34.942 -22.619,35.069 27.419,35.069 cw(c27.419,32.529) 29.959,32.529 29.959,2.532 cw(c27.419,2.532) 27.419,-0.008 -22.441,-0.008 cw(c-22.441,2.532) -24.981,2.532 -24.981,32.809 cw(c-22.771,32.809) -22.771,35.018
GND on Top Layer "Top Layer-GND" (solid, remove dead copper, pour order 0): -22.619,35.018 -22.542,34.942 27.521,34.942 cw(c27.521,32.529) 29.934,32.529 29.934,2.583 cw(c27.394,2.583) 27.394,0.043 -22.466,0.043 cw(c-22.466,2.583) -25.006,2.583 -25.006,32.656 cw(c-22.695,32.656) -22.695,34.968

## Silkscreen, mask and mechanical layers (free items; w line width, h text height)
Top Overlay:
  drawing of 590 lines, arcs and shapes, not listed
  text "3V3" at -0.876,34.307 h0.64 r270
  text "VBAT" at -17.183,32.58 h0.64 r270
  text "GND" at -8.166,32.58 h0.64 r270
  text "GND" at -0.876,31.843 h0.64 r270
  text "DIO" at -0.876,29.303 h0.64 r270
  text "CLK" at -0.876,26.713 h0.64 r270
  text "TX" at -1.003,23.055 h0.64 r270
  text "RX" at -1.003,20.566 h0.64 r270
  text "VCC" at -18.682,20.083 h0.64 r270
  text "GND" at -0.927,17.772 h0.64 r270
  text "3V3" at -18.682,17.645 h0.64 r270
  text "GND" at -18.682,15.079 h0.64 r270
  text "RX" at -18.682,12.565 h0.64 r270
  text "MDBK" at -12.624,10.135 h1.78
  text "TX" at -18.682,10.101 h0.64 r270
  text "IO" at -18.682,7.434 h0.64 r270
  text "BOOT" at -11.201,1.93 h0.64
  text "RESET" at -3.937,1.93 h0.64
Mechanical 1:
  lines w0.013: 0,-0.002 0,34.998 ; -25,2.999 ccw(c-21.999,2.999) -21.999,-0.002 27,-0.002 ccw(c27,2.998) 30,2.998 30,31.998 ccw(c27,31.998) 27,34.998 -22,34.998 ccw(c-22,31.998) -25,31.998 -25,2.999